# Altium PCB ACH512识别升级仪V1.2_20260608.PcbDoc (part 5 of 6)
Units mil, origin at the board's own origin, x right, y up, seen from the top; angles counter-clockwise.
Board outline 6141.73 x 5401.57 mil, 2 copper layers (Top Layer, Bottom Layer); 157 components, 111 nets, 548 pads, 222 vias.
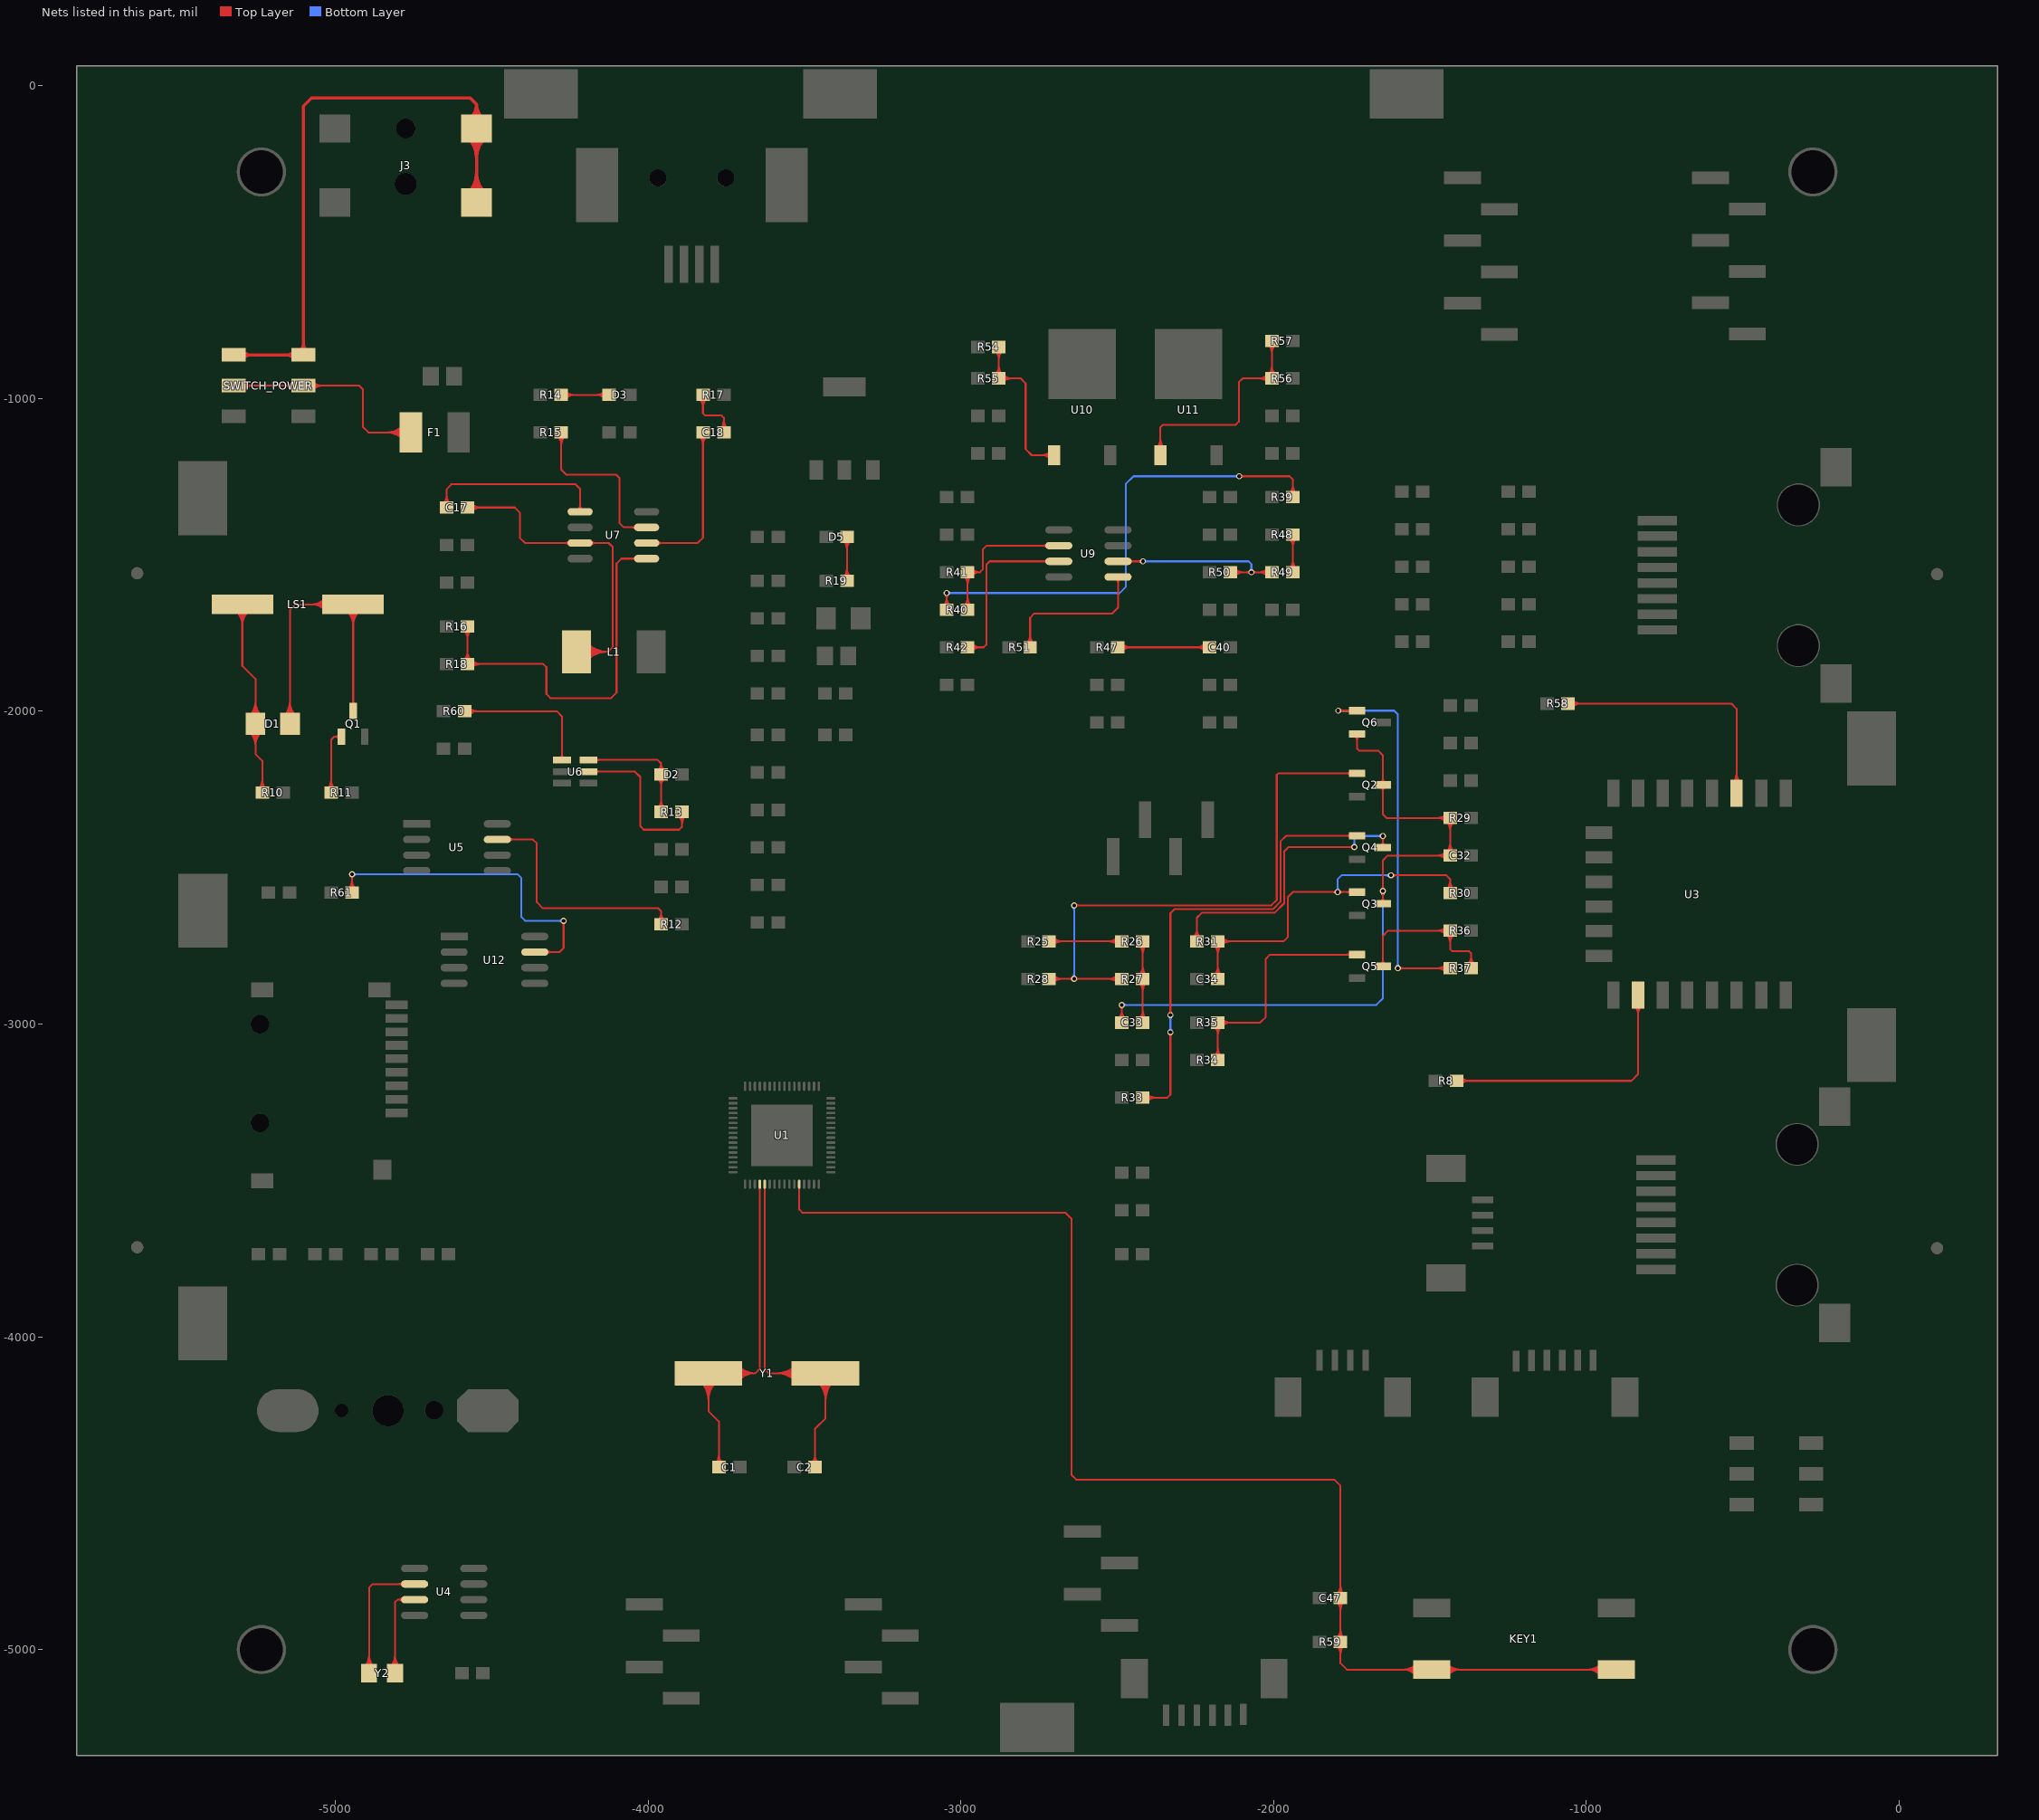
[diagram p5: the nets of this part, all layers, seen from the top]

## Via types
v1: diameter 19.68, hole 11.81, Top Layer to Bottom Layer, 222 vias

## Nets (pads, with @x,y where several pads share a name; then routed paths per layer and width w, separated by ;. In a path a pad name is that pad's centre, name@x,y a point inside that pad or via, vN(x,y) a via of type N, cw(c..) or ccw(c..) an arc to the next point about the centre after c; other vN are vias at no path point) (continued)
NetC17_1: C17.1 U7.1 | length 708.8
  Top Layer w6: C17.1@-4656.07,-1336.79 ccw(c-4685.68,-1307.19) -4643.81,-1307.19 ; C17.1@-4651.83,-1341.03 ccw(c-4671.19,-1321.67) -4643.81,-1321.67 ; C17.1@-4644.27,-1348.59 -4643.81,-1348.13 -4643.81,-1289.59 -4628.81,-1274.59 -4231.81,-1274.59 -4217.11,-1289.29 U7.1@-4217.11,-1362.01 ; -4643.81,-1323.92 ccw(c-4619.6,-1323.92) C17.1@-4636.72,-1341.03 ; -4643.81,-1309.43 ccw(c-4605.11,-1309.43) C17.1@-4632.48,-1336.79 ; U7.1@-4223.47,-1355.64 ccw(c-4238.84,-1340.28) -4217.11,-1340.28 ccw(c-4195.38,-1340.28) U7.1@-4210.75,-1355.64
NetC17_2: C17.2 L1.1 U7.3 | length 1663.5
  Top Layer w6: C17.2@-4577.35,-1348.59 -4425.81,-1348.59 -4409.81,-1364.59 -4409.81,-1445 -4392.8,-1462.01 U7.3@-4217.11,-1462.01 -4125.99,-1462.01 -4112.81,-1475.19 -4112.81,-1794 -4128.33,-1809.52 ; C17.2@-4567.82,-1356.15 cw(c-4549.58,-1374.39) -4549.58,-1348.59 cw(c-4549.58,-1322.79) C17.2@-4567.82,-1341.03 ; C17.2@-4563.58,-1360.39 cw(c-4535.1,-1388.87) -4535.1,-1348.59 cw(c-4535.1,-1308.31) C17.2@-4563.58,-1336.79 ; U7.3@-4251.47,-1468.37 ccw(c-4266.84,-1483.74) -4266.84,-1462.01 ccw(c-4266.84,-1440.28) U7.3@-4251.47,-1455.64 ; L1.1@-4228.4,-1809.52 -4128.33,-1809.52 ; L1.1@-4210.01,-1826.82 cw(c-4169.98,-1864.48) -4169.98,-1809.52 cw(c-4169.98,-1754.57) L1.1@-4210.01,-1792.22 ; L1.1@-4205.64,-1830.94 cw(c-4156.1,-1877.53) -4156.1,-1809.52 cw(c-4156.1,-1741.51) L1.1@-4205.64,-1788.11 ; L1.1@-4201.27,-1835.05 cw(c-4142.22,-1890.59) -4142.22,-1809.52 cw(c-4142.22,-1728.46) L1.1@-4201.27,-1784 ; L1.1@-4196.9,-1839.16 cw(c-4128.34,-1903.65) -4128.34,-1809.52 ; L1.1@-4196.9,-1779.89 ccw(c-4128.34,-1715.4) -4128.34,-1809.52 ; U7.3@-4182.75,-1468.37 cw(c-4167.38,-1483.74) -4167.38,-1462.01 cw(c-4167.38,-1440.28) U7.3@-4182.75,-1455.64
NetC18_1: C18.1 U7.6 | length 661.6
  Top Layer w6: U7.6@-4004.51,-1462.01 -3841.28,-1462.01 -3824.27,-1445 C18.1@-3824.27,-1108.59 ; U7.6@-3970.15,-1468.37 cw(c-3954.78,-1483.74) -3954.78,-1462.01 cw(c-3954.78,-1440.28) U7.6@-3970.15,-1455.64 ; C18.1@-3836.07,-1120.39 cw(c-3864.56,-1148.87) -3824.27,-1148.87 cw(c-3783.99,-1148.87) C18.1@-3812.48,-1120.39 ; C18.1@-3831.83,-1116.15 cw(c-3850.07,-1134.39) -3824.27,-1134.39 cw(c-3798.48,-1134.39) C18.1@-3816.72,-1116.15
NetC18_2: C18.2 R17.2 | length 385.8
  Top Layer w6: R17.2@-3836.07,-1000.39 cw(c-3864.56,-1028.87) -3824.27,-1028.87 cw(c-3783.99,-1028.87) R17.2@-3812.48,-1000.39 ; R17.2@-3831.83,-996.15 cw(c-3850.07,-1014.39) -3824.27,-1014.39 cw(c-3798.48,-1014.39) R17.2@-3816.72,-996.15 ; R17.2@-3824.27,-988.59 -3824.27,-1047.13 -3816.81,-1054.59 -3764.81,-1054.59 -3757.35,-1062.05 C18.2@-3757.35,-1108.59 ; C18.2@-3769.14,-1096.79 ccw(c-3797.63,-1068.31) -3757.35,-1068.31 ccw(c-3717.06,-1068.31) C18.2@-3745.55,-1096.79 ; C18.2@-3764.9,-1101.03 ccw(c-3783.14,-1082.79) -3757.35,-1082.79 ccw(c-3731.55,-1082.79) C18.2@-3749.79,-1101.03
NetC32_1: C32.1 C33.2 Q2.3 Q3.3 Q6.2 R29.1 | length 3052.4
  Top Layer w6: C33.2@-2497.07,-2983.79 ccw(c-2525.56,-2955.31) -2485.27,-2955.31 ccw(c-2444.99,-2955.31) C33.2@-2473.48,-2983.79 ; C33.2@-2492.83,-2988.03 ccw(c-2511.07,-2969.79) -2485.27,-2969.79 ccw(c-2459.48,-2969.79) C33.2@-2477.72,-2988.03 ; v1@-2490.11,-2943.89 cw(c-2501.79,-2955.57) -2485.27,-2955.57 cw(c-2468.76,-2955.57) v1@-2480.44,-2943.89 ; C33.2@-2485.27,-2995.59 v1(-2485.27,-2939.05) ; Q6.2@-1739.38,-2079.22 cw(c-1754.42,-2094.26) -1733.15,-2094.26 cw(c-1711.88,-2094.26) Q6.2@-1726.92,-2079.22 ; Q6.2@-1733.15,-2072.99 -1733.15,-2119.25 -1726.81,-2125.59 -1665.81,-2125.59 -1650.47,-2140.93 Q2.3@-1650.47,-2235.59 -1650.47,-2328.93 -1637.81,-2341.59 R29.1@-1435.27,-2341.59 C32.1@-1435.27,-2461.59 -1634.81,-2461.59 -1650.47,-2477.25 v1(-1650.47,-2574.59) Q3.3@-1650.47,-2615.59 ; Q3.3@-1656.7,-2609.36 ccw(c-1671.74,-2594.32) -1650.47,-2594.32 ccw(c-1629.2,-2594.32) Q3.3@-1644.24,-2609.36 ; Q2.3@-1656.7,-2241.82 cw(c-1671.74,-2256.86) -1650.47,-2256.86 cw(c-1629.2,-2256.86) Q2.3@-1644.24,-2241.82 ; Q2.3@-1656.7,-2229.36 ccw(c-1671.74,-2214.32) -1650.47,-2214.32 ccw(c-1629.2,-2214.32) Q2.3@-1644.24,-2229.36 ; v1@-1655.31,-2579.43 cw(c-1666.99,-2591.11) -1650.47,-2591.11 cw(c-1633.95,-2591.11) v1@-1645.63,-2579.43 ; v1@-1655.31,-2569.75 ccw(c-1666.99,-2558.07) -1650.47,-2558.07 ccw(c-1633.95,-2558.07) v1@-1645.63,-2569.75 ; C32.1@-1449.04,-2473.39 ccw(c-1477.52,-2501.87) -1477.52,-2461.59 ccw(c-1477.52,-2421.31) C32.1@-1449.04,-2449.79 ; R29.1@-1449.04,-2353.39 ccw(c-1477.52,-2381.87) -1477.52,-2341.59 ccw(c-1477.52,-2301.31) R29.1@-1449.04,-2329.79 ; C32.1@-1447.07,-2449.79 ccw(c-1475.56,-2421.31) -1435.27,-2421.31 ccw(c-1394.99,-2421.31) C32.1@-1423.48,-2449.79 ; R29.1@-1447.07,-2353.39 cw(c-1475.56,-2381.87) -1435.27,-2381.87 cw(c-1394.99,-2381.87) R29.1@-1423.48,-2353.39 ; C32.1@-1444.8,-2469.15 ccw(c-1463.04,-2487.39) -1463.04,-2461.59 ccw(c-1463.04,-2435.79) C32.1@-1444.8,-2454.03 ; R29.1@-1444.8,-2349.15 ccw(c-1463.04,-2367.39) -1463.04,-2341.59 ccw(c-1463.04,-2315.79) R29.1@-1444.8,-2334.03 ; C32.1@-1442.83,-2454.03 ccw(c-1461.07,-2435.79) -1435.27,-2435.79 ccw(c-1409.48,-2435.79) C32.1@-1427.72,-2454.03 ; R29.1@-1442.83,-2349.15 cw(c-1461.07,-2367.39) -1435.27,-2367.39 cw(c-1409.48,-2367.39) R29.1@-1427.72,-2349.15
  Bottom Layer w6: v1(-2485.27,-2939.05) -1671.27,-2939.05 -1650.47,-2918.25 v1(-1650.47,-2574.59) ; v1@-2480.44,-2943.89 cw(c-2468.76,-2955.57) -2468.76,-2939.05 cw(c-2468.76,-2922.54) v1@-2480.44,-2934.22 ; v1@-1655.31,-2579.43 cw(c-1666.99,-2591.11) -1650.47,-2591.11 cw(c-1633.95,-2591.11) v1@-1645.63,-2579.43
NetC33_1: C33.1 R26.1 R27.2 | length 675.2
  Top Layer w6: C33.1@-2430.14,-2983.79 ccw(c-2458.63,-2955.31) -2418.35,-2955.31 ccw(c-2378.06,-2955.31) C33.1@-2406.55,-2983.79 ; R27.2@-2430.14,-2867.39 cw(c-2458.63,-2895.87) -2418.35,-2895.87 cw(c-2378.06,-2895.87) R27.2@-2406.55,-2867.39 ; R27.2@-2430.14,-2843.79 ccw(c-2458.63,-2815.31) -2418.35,-2815.31 ccw(c-2378.06,-2815.31) R27.2@-2406.55,-2843.79 ; R26.1@-2430.14,-2747.39 cw(c-2458.63,-2775.87) -2418.35,-2775.87 cw(c-2378.06,-2775.87) R26.1@-2406.55,-2747.39 ; C33.1@-2425.9,-2988.03 ccw(c-2444.14,-2969.79) -2418.35,-2969.79 ccw(c-2392.55,-2969.79) C33.1@-2410.79,-2988.03 ; R27.2@-2425.9,-2863.15 cw(c-2444.14,-2881.39) -2418.35,-2881.39 cw(c-2392.55,-2881.39) R27.2@-2410.79,-2863.15 ; R27.2@-2425.9,-2848.03 ccw(c-2444.14,-2829.79) -2418.35,-2829.79 ccw(c-2392.55,-2829.79) R27.2@-2410.79,-2848.03 ; R26.1@-2425.9,-2743.15 cw(c-2444.14,-2761.39) -2418.35,-2761.39 cw(c-2392.55,-2761.39) R26.1@-2410.79,-2743.15 ; C33.1@-2418.35,-2995.59 R26.1@-2418.35,-2735.59
NetC34_2: C34.2 Q3.1 R30.1 R31.1 | length 1739.5
  Top Layer w6: C34.2@-2190.14,-2843.79 ccw(c-2218.63,-2815.31) -2178.35,-2815.31 ccw(c-2138.06,-2815.31) C34.2@-2166.55,-2843.79 ; R31.1@-2190.14,-2747.39 cw(c-2218.63,-2775.87) -2178.35,-2775.87 cw(c-2138.06,-2775.87) R31.1@-2166.55,-2747.39 ; C34.2@-2185.9,-2848.03 ccw(c-2204.14,-2829.79) -2178.35,-2829.79 ccw(c-2152.55,-2829.79) C34.2@-2170.79,-2848.03 ; R31.1@-2185.9,-2743.15 cw(c-2204.14,-2761.39) -2178.35,-2761.39 cw(c-2152.55,-2761.39) R31.1@-2170.79,-2743.15 ; C34.2@-2178.35,-2855.59 R31.1@-2178.35,-2735.59 -1967.81,-2735.59 -1953.81,-2721.59 -1953.81,-2593.59 -1938.41,-2578.19 v1(-1794.81,-2578.19) Q3.1@-1733.15,-2578.19 ; R31.1@-2168.82,-2743.15 cw(c-2150.58,-2761.39) -2150.58,-2735.59 cw(c-2150.58,-2709.79) R31.1@-2168.82,-2728.03 ; R31.1@-2164.58,-2747.39 cw(c-2136.1,-2775.87) -2136.1,-2735.59 cw(c-2136.1,-2695.31) R31.1@-2164.58,-2723.79 ; v1@-1799.65,-2583.03 ccw(c-1811.33,-2594.71) -1811.33,-2578.19 ccw(c-1811.33,-2561.67) v1@-1799.65,-2573.35 ; v1@-1789.97,-2583.03 cw(c-1778.29,-2594.71) -1778.29,-2578.19 cw(c-1778.29,-2561.67) v1@-1789.97,-2573.35 ; Q3.1@-1753.16,-2584.42 ccw(c-1768.2,-2599.46) -1768.2,-2578.19 ccw(c-1768.2,-2556.92) Q3.1@-1753.16,-2571.96 ; v1(-1624.81,-2524.59) -1447.81,-2524.59 -1435.27,-2537.13 R30.1@-1435.27,-2581.59 ; v1@-1619.97,-2529.43 cw(c-1608.29,-2541.11) -1608.29,-2524.59 cw(c-1608.29,-2508.07) v1@-1619.97,-2519.75 ; R30.1@-1447.07,-2569.79 ccw(c-1475.56,-2541.31) -1435.27,-2541.31 ccw(c-1394.99,-2541.31) R30.1@-1423.48,-2569.79 ; R30.1@-1442.83,-2574.03 ccw(c-1461.07,-2555.79) -1435.27,-2555.79 ccw(c-1409.48,-2555.79) R30.1@-1427.72,-2574.03
  Bottom Layer w6: v1@-1799.65,-2573.35 ccw(c-1811.33,-2561.67) -1794.81,-2561.67 ccw(c-1778.29,-2561.67) v1@-1789.97,-2573.35 ; v1(-1794.81,-2578.19) -1794.81,-2536.59 -1782.81,-2524.59 v1(-1624.81,-2524.59) ; v1@-1629.65,-2529.43 ccw(c-1641.33,-2541.11) -1641.33,-2524.59 ccw(c-1641.33,-2508.07) v1@-1629.65,-2519.75
NetC40_2: C40.2 R47.1 | length 500.7
  Top Layer w6: R47.1@-2498.35,-1795.59 C40.2@-2205.27,-1795.59 ; R47.1@-2488.82,-1803.15 cw(c-2470.58,-1821.39) -2470.58,-1795.59 cw(c-2470.58,-1769.79) R47.1@-2488.82,-1788.03 ; R47.1@-2484.58,-1807.39 cw(c-2456.1,-1835.87) -2456.1,-1795.59 cw(c-2456.1,-1755.31) R47.1@-2484.58,-1783.79 ; C40.2@-2219.04,-1807.39 ccw(c-2247.52,-1835.87) -2247.52,-1795.59 ccw(c-2247.52,-1755.31) C40.2@-2219.04,-1783.79 ; C40.2@-2214.8,-1803.15 ccw(c-2233.04,-1821.39) -2233.04,-1795.59 ccw(c-2233.04,-1769.79) C40.2@-2214.8,-1788.03
NetD1_1: D1.1 LS1.1 Q1.3 | length 1715.5
  Top Layer w6: D1.1@-5165.03,-2015.91 ccw(c-5213.68,-1967.27) -5144.88,-1967.27 ccw(c-5076.09,-1967.27) D1.1@-5124.73,-2015.91 ; D1.1@-5160.79,-2020.16 ccw(c-5199.19,-1981.75) -5144.88,-1981.75 ccw(c-5090.57,-1981.75) D1.1@-5128.97,-2020.16 ; D1.1@-5156.55,-2024.4 ccw(c-5184.71,-1996.24) -5144.88,-1996.24 ccw(c-5105.06,-1996.24) D1.1@-5133.22,-2024.4 ; D1.1@-5144.88,-2040 -5144.88,-1674.88 -5128.37,-1658.37 LS1.1@-4942.83,-1658.37 Q1.3@-4942.83,-1998.66 ; LS1.1@-5029.91,-1678.52 ccw(c-5078.56,-1727.16) -5078.56,-1658.37 ccw(c-5078.56,-1589.57) LS1.1@-5029.91,-1638.22 ; LS1.1@-5025.67,-1674.28 ccw(c-5064.07,-1712.68) -5064.07,-1658.37 ccw(c-5064.07,-1604.06) LS1.1@-5025.67,-1642.46 ; LS1.1@-5021.43,-1670.03 ccw(c-5049.59,-1698.19) -5049.59,-1658.37 ccw(c-5049.59,-1618.54) LS1.1@-5021.43,-1646.71 ; LS1.1@-4962.98,-1678.52 cw(c-5011.63,-1727.16) -4942.83,-1727.16 cw(c-4874.04,-1727.16) LS1.1@-4922.68,-1678.52 ; LS1.1@-4958.74,-1674.28 cw(c-4997.14,-1712.68) -4942.83,-1712.68 cw(c-4888.52,-1712.68) LS1.1@-4926.93,-1674.28 ; LS1.1@-4954.5,-1670.03 cw(c-4982.66,-1698.19) -4942.83,-1698.19 cw(c-4903.01,-1698.19) LS1.1@-4931.17,-1670.03 ; Q1.3@-4949.06,-1978.65 ccw(c-4964.11,-1963.61) -4942.83,-1963.61 ccw(c-4921.56,-1963.61) Q1.3@-4936.6,-1978.65
NetD1_2: D1.2 LS1.2 R10.1 | length 1499.6
  Top Layer w6: LS1.2@-5317.32,-1678.52 cw(c-5365.96,-1727.16) -5297.17,-1727.16 cw(c-5228.37,-1727.16) LS1.2@-5277.02,-1678.52 ; LS1.2@-5313.07,-1674.28 cw(c-5351.48,-1712.68) -5297.17,-1712.68 cw(c-5242.86,-1712.68) LS1.2@-5281.26,-1674.28 ; LS1.2@-5308.83,-1670.03 cw(c-5336.99,-1698.19) -5297.17,-1698.19 cw(c-5257.34,-1698.19) LS1.2@-5285.5,-1670.03 ; LS1.2@-5297.17,-1658.37 -5297.17,-1854.83 -5255.12,-1896.88 D1.2@-5255.12,-2040 -5255.12,-2136.88 -5233.46,-2158.54 R10.1@-5233.46,-2260 ; D1.2@-5275.27,-2064.09 cw(c-5323.91,-2112.73) -5255.12,-2112.73 cw(c-5186.32,-2112.73) D1.2@-5234.97,-2064.09 ; D1.2@-5275.27,-2015.91 ccw(c-5323.91,-1967.27) -5255.12,-1967.27 ccw(c-5186.32,-1967.27) D1.2@-5234.97,-2015.91 ; D1.2@-5271.03,-2059.84 cw(c-5309.43,-2098.25) -5255.12,-2098.25 cw(c-5200.81,-2098.25) D1.2@-5239.21,-2059.84 ; D1.2@-5271.03,-2020.16 ccw(c-5309.43,-1981.75) -5255.12,-1981.75 ccw(c-5200.81,-1981.75) D1.2@-5239.21,-2020.16 ; D1.2@-5266.78,-2055.6 cw(c-5294.94,-2083.76) -5255.12,-2083.76 cw(c-5215.29,-2083.76) D1.2@-5243.45,-2055.6 ; D1.2@-5266.78,-2024.4 ccw(c-5294.94,-1996.24) -5255.12,-1996.24 ccw(c-5215.29,-1996.24) D1.2@-5243.45,-2024.4 ; R10.1@-5245.26,-2248.2 ccw(c-5273.75,-2219.72) -5233.46,-2219.72 ccw(c-5193.18,-2219.72) R10.1@-5221.67,-2248.2 ; R10.1@-5241.02,-2252.44 ccw(c-5259.26,-2234.2) -5233.46,-2234.2 ccw(c-5207.67,-2234.2) R10.1@-5225.91,-2252.44
NetD2_1: D2.1 R13.1 U6.6 | length 711.2
  Top Layer w6: U6.6@-4190.49,-2155.51 -3969.49,-2155.51 -3958.27,-2166.73 ; U6.6@-4167.23,-2161.05 cw(c-4153.87,-2174.41) -4153.87,-2155.51 cw(c-4153.87,-2136.61) U6.6@-4167.23,-2149.98 ; R13.1@-3970.07,-2309.79 ccw(c-3998.56,-2281.31) -3958.27,-2281.31 ccw(c-3917.99,-2281.31) R13.1@-3946.48,-2309.79 ; D2.1@-3970.07,-2213.39 cw(c-3998.56,-2241.87) -3958.27,-2241.87 cw(c-3917.99,-2241.87) D2.1@-3946.48,-2213.39 ; D2.1@-3968.74,-2188.6 ccw(c-3986.35,-2166.73) -3958.27,-2166.73 ; R13.1@-3965.83,-2314.03 ccw(c-3984.07,-2295.79) -3958.27,-2295.79 ccw(c-3932.48,-2295.79) R13.1@-3950.72,-2314.03 ; D2.1@-3965.83,-2209.15 cw(c-3984.07,-2227.39) -3958.27,-2227.39 cw(c-3932.48,-2227.39) D2.1@-3950.72,-2209.15 ; D2.1@-3964.98,-2193.27 ccw(c-3976.26,-2179.26) -3958.27,-2179.26 ccw(c-3940.29,-2179.26) D2.1@-3951.57,-2193.27 ; R13.1@-3958.27,-2321.59 D2.1@-3958.27,-2201.59 -3958.27,-2166.73 ; D2.1@-3947.81,-2188.6 cw(c-3930.2,-2166.73) -3958.27,-2166.73
NetD3_1: D3.1 R14.1 | length 360.7
  Top Layer w6: R14.1@-4277.35,-988.59 D3.1@-4124.27,-988.59 ; R14.1@-4267.82,-996.15 cw(c-4249.58,-1014.39) -4249.58,-988.59 cw(c-4249.58,-962.79) R14.1@-4267.82,-981.03 ; R14.1@-4263.58,-1000.39 cw(c-4235.1,-1028.87) -4235.1,-988.59 cw(c-4235.1,-948.31) R14.1@-4263.58,-976.79 ; D3.1@-4138.04,-1000.39 ccw(c-4166.52,-1028.87) -4166.52,-988.59 ccw(c-4166.52,-948.31) D3.1@-4138.04,-976.79 ; D3.1@-4133.8,-996.15 ccw(c-4152.04,-1014.39) -4152.04,-988.59 ccw(c-4152.04,-962.79) D3.1@-4133.8,-981.03
NetD5_1: D5.1 R19.1 | length 347.6
  Top Layer w6: R19.1@-3375.61,-1570.79 ccw(c-3404.09,-1542.31) -3363.81,-1542.31 ccw(c-3323.53,-1542.31) R19.1@-3352.01,-1570.79 ; D5.1@-3375.61,-1454.39 cw(c-3404.09,-1482.87) -3363.81,-1482.87 cw(c-3323.53,-1482.87) D5.1@-3352.01,-1454.39 ; R19.1@-3371.37,-1575.03 ccw(c-3389.61,-1556.79) -3363.81,-1556.79 ccw(c-3338.01,-1556.79) R19.1@-3356.25,-1575.03 ; D5.1@-3371.37,-1450.15 cw(c-3389.61,-1468.39) -3363.81,-1468.39 cw(c-3338.01,-1468.39) D5.1@-3356.25,-1450.15 ; R19.1@-3363.81,-1582.59 D5.1@-3363.81,-1442.59
NetF1_1: F1.1 SWITCH_POWER.2 | length 1418.9
  Top Layer w6: SWITCH_POWER.2@-5324.25,-959.16 SWITCH_POWER.2@-5101.81,-959.16 -4923.24,-959.16 -4911.81,-970.59 -4911.81,-1090.59 -4893.81,-1108.59 F1.1@-4757.81,-1108.59 ; SWITCH_POWER.2@-5298.57,-968.11 cw(c-5276.97,-989.71) -5276.97,-959.16 cw(c-5276.97,-928.62) SWITCH_POWER.2@-5298.57,-950.22 ; SWITCH_POWER.2@-5294.33,-972.35 cw(c-5262.48,-1004.2) -5262.48,-959.16 cw(c-5262.48,-914.13) SWITCH_POWER.2@-5294.33,-945.97 ; SWITCH_POWER.2@-5131.73,-972.35 ccw(c-5163.58,-1004.2) -5163.58,-959.16 ccw(c-5163.58,-914.13) SWITCH_POWER.2@-5131.73,-945.97 ; SWITCH_POWER.2@-5127.49,-968.11 ccw(c-5149.09,-989.71) -5149.09,-959.16 ccw(c-5149.09,-928.62) SWITCH_POWER.2@-5127.49,-950.22 ; SWITCH_POWER.2@-5076.13,-968.11 cw(c-5054.53,-989.71) -5054.53,-959.16 cw(c-5054.53,-928.62) SWITCH_POWER.2@-5076.13,-950.22 ; SWITCH_POWER.2@-5071.89,-972.35 cw(c-5040.04,-1004.2) -5040.04,-959.16 cw(c-5040.04,-914.13) SWITCH_POWER.2@-5071.89,-945.97 ; F1.1@-4781.14,-1131.92 ccw(c-4837.48,-1188.26) -4837.48,-1108.59 ccw(c-4837.48,-1028.92) F1.1@-4781.14,-1085.26 ; F1.1@-4776.9,-1127.68 ccw(c-4822.99,-1173.77) -4822.99,-1108.59 ccw(c-4822.99,-1043.41) F1.1@-4776.9,-1089.5 ; F1.1@-4772.66,-1123.44 ccw(c-4808.51,-1159.29) -4808.51,-1108.59 ccw(c-4808.51,-1057.89) F1.1@-4772.66,-1093.74 ; F1.1@-4768.42,-1119.2 ccw(c-4794.02,-1144.8) -4794.02,-1108.59 ccw(c-4794.02,-1072.38) F1.1@-4768.42,-1097.98
NetQ1_2: Q1.1 R11.2 | length 343.2
  Top Layer w6: R11.2@-5025.26,-2248.2 ccw(c-5053.75,-2219.72) -5013.46,-2219.72 ccw(c-4973.18,-2219.72) R11.2@-5001.67,-2248.2 ; R11.2@-5021.02,-2252.44 ccw(c-5039.26,-2234.2) -5013.46,-2234.2 ccw(c-4987.67,-2234.2) R11.2@-5005.91,-2252.44 ; R11.2@-5013.46,-2260 -5013.46,-2091.46 -5003.34,-2081.34 Q1.1@-4980.24,-2081.34 ; Q1.1@-4986.47,-2087.57 ccw(c-5001.51,-2102.61) -5001.51,-2081.34 ccw(c-5001.51,-2060.07) Q1.1@-4986.47,-2075.11
NetQ2_1: Q2.1 R27.1 R28.2 | length 2152.8
  Top Layer w6: R28.2@-2718.35,-2855.59 v1(-2637.81,-2855.59) R27.1@-2485.27,-2855.59 ; R28.2@-2708.82,-2863.15 cw(c-2690.58,-2881.39) -2690.58,-2855.59 cw(c-2690.58,-2829.79) R28.2@-2708.82,-2848.03 ; R28.2@-2704.58,-2867.39 cw(c-2676.1,-2895.87) -2676.1,-2855.59 cw(c-2676.1,-2815.31) R28.2@-2704.58,-2843.79 ; v1@-2642.65,-2860.43 ccw(c-2654.33,-2872.11) -2654.33,-2855.59 ccw(c-2654.33,-2839.07) v1@-2642.65,-2850.75 ; v1(-2637.81,-2620.59) -2006.75,-2620.59 -1989.81,-2603.65 -1989.81,-2203.59 -1984.41,-2198.19 Q2.1@-1733.15,-2198.19 ; v1@-2632.97,-2860.43 cw(c-2621.29,-2872.11) -2621.29,-2855.59 cw(c-2621.29,-2839.07) v1@-2632.97,-2850.75 ; v1@-2632.97,-2625.43 cw(c-2621.29,-2637.11) -2621.29,-2620.59 cw(c-2621.29,-2604.07) v1@-2632.97,-2615.75 ; R27.1@-2499.04,-2867.39 ccw(c-2527.52,-2895.87) -2527.52,-2855.59 ccw(c-2527.52,-2815.31) R27.1@-2499.04,-2843.79 ; R27.1@-2494.8,-2863.15 ccw(c-2513.04,-2881.39) -2513.04,-2855.59 ccw(c-2513.04,-2829.79) R27.1@-2494.8,-2848.03 ; Q2.1@-1753.16,-2204.42 ccw(c-1768.2,-2219.46) -1768.2,-2198.19 ccw(c-1768.2,-2176.92) Q2.1@-1753.16,-2191.96
  Bottom Layer w6: v1@-2642.65,-2850.75 ccw(c-2654.33,-2839.07) -2637.81,-2839.07 ccw(c-2621.29,-2839.07) v1@-2632.97,-2850.75 ; v1@-2642.65,-2625.43 cw(c-2654.33,-2637.11) -2637.81,-2637.11 cw(c-2621.29,-2637.11) v1@-2632.97,-2625.43 ; v1(-2637.81,-2855.59) v1(-2637.81,-2620.59)
NetQ4_1: Q4.3 R31.2 | length 1169.2
  Top Layer w6: R31.2@-2257.07,-2723.79 ccw(c-2285.56,-2695.31) -2245.27,-2695.31 ccw(c-2204.99,-2695.31) R31.2@-2233.48,-2723.79 ; R31.2@-2252.83,-2728.03 ccw(c-2271.07,-2709.79) -2245.27,-2709.79 ccw(c-2219.48,-2709.79) R31.2@-2237.72,-2728.03 ; R31.2@-2245.27,-2735.59 -2245.27,-2660.05 -2229.81,-2644.59 -1996.81,-2644.59 -1965.81,-2613.59 -1965.81,-2447.59 -1952.81,-2434.59 v1(-1741.81,-2434.59) ; v1@-1746.65,-2439.43 ccw(c-1758.33,-2451.11) -1758.33,-2434.59 ccw(c-1758.33,-2418.07) v1@-1746.65,-2429.75 ; Q4.3@-1656.7,-2429.36 ccw(c-1671.74,-2414.32) -1650.47,-2414.32 ccw(c-1629.2,-2414.32) Q4.3@-1644.24,-2429.36 ; v1@-1655.31,-2403.77 cw(c-1666.99,-2415.45) -1650.47,-2415.45 cw(c-1633.95,-2415.45) v1@-1645.63,-2403.77 ; Q4.3@-1650.47,-2435.59 v1(-1650.47,-2398.93)
  Bottom Layer w6: v1@-1746.65,-2429.75 ccw(c-1758.33,-2418.07) -1741.81,-2418.07 ccw(c-1725.29,-2418.07) v1@-1736.97,-2429.75 ; v1(-1741.81,-2434.59) -1741.81,-2407.59 -1733.15,-2398.93 v1(-1650.47,-2398.93) ; v1@-1655.31,-2403.77 ccw(c-1666.99,-2415.45) -1666.99,-2398.93 ccw(c-1666.99,-2382.41) v1@-1655.31,-2394.09
NetQ4_2: Q4.1 R33.1 | length 1725.3
  Top Layer w6: R33.1@-2418.35,-3235.59 -2339.81,-3235.59 -2329.81,-3225.59 v1(-2329.81,-3026.59) ; R33.1@-2408.82,-3243.15 cw(c-2390.58,-3261.39) -2390.58,-3235.59 cw(c-2390.58,-3209.79) R33.1@-2408.82,-3228.03 ; R33.1@-2404.58,-3247.39 cw(c-2376.1,-3275.87) -2376.1,-3235.59 cw(c-2376.1,-3195.31) R33.1@-2404.58,-3223.79 ; v1@-2334.65,-3031.43 cw(c-2346.33,-3043.11) -2329.81,-3043.11 cw(c-2313.29,-3043.11) v1@-2324.97,-3031.43 ; v1@-2334.65,-2966.75 ccw(c-2346.33,-2955.07) -2329.81,-2955.07 ccw(c-2313.29,-2955.07) v1@-2324.97,-2966.75 ; v1(-2329.81,-2971.59) -2329.81,-2645.59 -2316.81,-2632.59 -2001.78,-2632.59 -1977.81,-2608.62 -1977.81,-2416.59 -1959.41,-2398.19 Q4.1@-1733.15,-2398.19 ; Q4.1@-1753.16,-2404.42 ccw(c-1768.2,-2419.46) -1768.2,-2398.19 ccw(c-1768.2,-2376.92) Q4.1@-1753.16,-2391.96
  Bottom Layer w6: v1@-2334.65,-3021.75 ccw(c-2346.33,-3010.07) -2329.81,-3010.07 ccw(c-2313.29,-3010.07) v1@-2324.97,-3021.75 ; v1@-2334.65,-2976.43 cw(c-2346.33,-2988.11) -2329.81,-2988.11 cw(c-2313.29,-2988.11) v1@-2324.97,-2976.43 ; v1(-2329.81,-3026.59) v1(-2329.81,-2971.59)
NetQ5_1: Q5.1 R34.1 R35.1 | length 1109
  Top Layer w6: R34.1@-2190.14,-3103.79 ccw(c-2218.63,-3075.31) -2178.35,-3075.31 ccw(c-2138.06,-3075.31) R34.1@-2166.55,-3103.79 ; R35.1@-2190.14,-3007.39 cw(c-2218.63,-3035.87) -2178.35,-3035.87 cw(c-2138.06,-3035.87) R35.1@-2166.55,-3007.39 ; R34.1@-2185.9,-3108.03 ccw(c-2204.14,-3089.79) -2178.35,-3089.79 ccw(c-2152.55,-3089.79) R34.1@-2170.79,-3108.03 ; R35.1@-2185.9,-3003.15 cw(c-2204.14,-3021.39) -2178.35,-3021.39 cw(c-2152.55,-3021.39) R35.1@-2170.79,-3003.15 ; R34.1@-2178.35,-3115.59 R35.1@-2178.35,-2995.59 -2042.81,-2995.59 -2024.81,-2977.59 -2024.81,-2791.59 -2011.41,-2778.19 Q5.1@-1733.15,-2778.19 ; R35.1@-2168.82,-3003.15 cw(c-2150.58,-3021.39) -2150.58,-2995.59 cw(c-2150.58,-2969.79) R35.1@-2168.82,-2988.03 ; R35.1@-2164.58,-3007.39 cw(c-2136.1,-3035.87) -2136.1,-2995.59 cw(c-2136.1,-2955.31) R35.1@-2164.58,-2983.79 ; Q5.1@-1753.16,-2784.42 ccw(c-1768.2,-2799.46) -1768.2,-2778.19 ccw(c-1768.2,-2756.92) Q5.1@-1753.16,-2771.96
NetQ5_3: Q5.3 R36.2 R37.2 | length 843.6
  Top Layer w6: Q5.3@-1656.7,-2809.36 ccw(c-1671.74,-2794.32) -1650.47,-2794.32 ccw(c-1629.2,-2794.32) Q5.3@-1644.24,-2809.36 ; Q5.3@-1650.47,-2815.59 -1650.47,-2718.25 -1633.81,-2701.59 R36.2@-1435.27,-2701.59 -1435.27,-2761.13 -1428.81,-2767.59 -1374.81,-2767.59 -1368.35,-2774.05 R37.2@-1368.35,-2821.59 ; R36.2@-1449.04,-2713.39 ccw(c-1477.52,-2741.87) -1477.52,-2701.59 ccw(c-1477.52,-2661.31) R36.2@-1449.04,-2689.79 ; R36.2@-1447.07,-2713.39 cw(c-1475.56,-2741.87) -1435.27,-2741.87 cw(c-1394.99,-2741.87) R36.2@-1423.48,-2713.39 ; R36.2@-1444.8,-2709.15 ccw(c-1463.04,-2727.39) -1463.04,-2701.59 ccw(c-1463.04,-2675.79) R36.2@-1444.8,-2694.03 ; R36.2@-1442.83,-2709.15 cw(c-1461.07,-2727.39) -1435.27,-2727.39 cw(c-1409.48,-2727.39) R36.2@-1427.72,-2709.15 ; R37.2@-1380.14,-2809.79 ccw(c-1408.63,-2781.31) -1368.35,-2781.31 ccw(c-1328.06,-2781.31) R37.2@-1356.55,-2809.79 ; R37.2@-1375.9,-2814.03 ccw(c-1394.14,-2795.79) -1368.35,-2795.79 ccw(c-1342.55,-2795.79) R37.2@-1360.79,-2814.03
NetQ6_2: Q6.1 R37.1 | length 1475.7
  Top Layer w6: v1(-1793.21,-1998.19) Q6.1@-1733.15,-1998.19 ; v1@-1788.37,-2003.03 cw(c-1776.69,-2014.71) -1776.69,-1998.19 cw(c-1776.69,-1981.67) v1@-1788.37,-1993.35 ; Q6.1@-1753.16,-2004.42 ccw(c-1768.2,-2019.46) -1768.2,-1998.19 ccw(c-1768.2,-1976.92) Q6.1@-1753.16,-1991.96 ; v1(-1602.81,-2821.59) R37.1@-1435.27,-2821.59 ; v1@-1597.97,-2826.43 cw(c-1586.29,-2838.11) -1586.29,-2821.59 cw(c-1586.29,-2805.07) v1@-1597.97,-2816.75 ; R37.1@-1449.04,-2833.39 ccw(c-1477.52,-2861.87) -1477.52,-2821.59 ccw(c-1477.52,-2781.31) R37.1@-1449.04,-2809.79 ; R37.1@-1444.8,-2829.15 ccw(c-1463.04,-2847.39) -1463.04,-2821.59 ccw(c-1463.04,-2795.79) R37.1@-1444.8,-2814.03
  Bottom Layer w6: v1(-1793.21,-1998.19) -1614.21,-1998.19 -1602.81,-2009.59 v1(-1602.81,-2821.59) ; v1@-1788.37,-2003.03 cw(c-1776.69,-2014.71) -1776.69,-1998.19 cw(c-1776.69,-1981.67) v1@-1788.37,-1993.35 ; v1@-1607.65,-2816.75 ccw(c-1619.33,-2805.07) -1602.81,-2805.07 ccw(c-1586.29,-2805.07) v1@-1597.97,-2816.75
NetR8_2: R8.2 U3.16 | length 1049.7
  Top Layer w6: R8.2@-1415.35,-3181.59 -855.81,-3181.59 -834.49,-3160.27 U3.16@-834.49,-2907.87 ; R8.2@-1405.82,-3189.15 cw(c-1387.58,-3207.39) -1387.58,-3181.59 cw(c-1387.58,-3155.79) R8.2@-1405.82,-3174.03 ; R8.2@-1401.58,-3193.39 cw(c-1373.1,-3221.87) -1373.1,-3181.59 cw(c-1373.1,-3141.31) R8.2@-1401.58,-3169.79 ; U3.16@-846.29,-2943.29 cw(c-874.77,-2971.78) -834.49,-2971.78 cw(c-794.21,-2971.78) U3.16@-822.69,-2943.29 ; U3.16@-842.04,-2939.05 cw(c-860.28,-2957.29) -834.49,-2957.29 cw(c-808.69,-2957.29) U3.16@-826.93,-2939.05
NetR12_2: R12.2 U5.7 | length 908.8
  Top Layer w6: U5.7@-4482.13,-2410 -4368,-2410 -4355.81,-2422.19 -4355.81,-2610.19 -4336,-2630 -3967,-2630 -3958.27,-2638.73 R12.2@-3958.27,-2681.59 ; U5.7@-4444.4,-2416.23 cw(c-4429.36,-2431.27) -4429.36,-2410 cw(c-4429.36,-2388.73) U5.7@-4444.4,-2403.77 ; R12.2@-3970.07,-2669.79 ccw(c-3998.56,-2641.31) -3958.27,-2641.31 ccw(c-3917.99,-2641.31) R12.2@-3946.48,-2669.79 ; R12.2@-3965.83,-2674.03 ccw(c-3984.07,-2655.79) -3958.27,-2655.79 ccw(c-3932.48,-2655.79) R12.2@-3950.72,-2674.03
NetR13_2: R13.2 U6.5 | length 653.2
  Top Layer w6: U6.5@-4190.49,-2192.91 -4042.09,-2192.91 -4024.81,-2210.19 -4024.81,-2367.59 -4013.81,-2378.59 -3900.81,-2378.59 -3891.35,-2369.13 R13.2@-3891.35,-2321.59 ; U6.5@-4167.23,-2198.45 cw(c-4153.87,-2211.81) -4153.87,-2192.91 cw(c-4153.87,-2174.02) U6.5@-4167.23,-2187.38 ; R13.2@-3903.14,-2333.39 cw(c-3931.63,-2361.87) -3891.35,-2361.87 cw(c-3851.06,-2361.87) R13.2@-3879.55,-2333.39 ; R13.2@-3898.9,-2329.15 cw(c-3917.14,-2347.39) -3891.35,-2347.39 cw(c-3865.55,-2347.39) R13.2@-3883.79,-2329.15
NetR15_1: R15.1 U7.7 | length 690.4
  Top Layer w6: R15.1@-4289.14,-1120.39 cw(c-4317.63,-1148.87) -4277.35,-1148.87 cw(c-4237.06,-1148.87) R15.1@-4265.55,-1120.39 ; R15.1@-4284.9,-1116.15 cw(c-4303.14,-1134.39) -4277.35,-1134.39 cw(c-4251.55,-1134.39) R15.1@-4269.79,-1116.15 ; R15.1@-4277.35,-1108.59 -4277.35,-1227.65 -4262,-1243 -4103,-1243 -4090.81,-1255.19 -4090.81,-1399 -4077.8,-1412.01 U7.7@-4004.51,-1412.01 ; U7.7@-4038.87,-1418.37 ccw(c-4054.24,-1433.74) -4054.24,-1412.01 ccw(c-4054.24,-1390.28) U7.7@-4038.87,-1405.64
NetR16_2: R16.2 R18.1 U7.5 | length 1560.7
  Top Layer w6: R18.1@-4589.14,-1836.79 ccw(c-4617.63,-1808.31) -4577.35,-1808.31 ccw(c-4537.06,-1808.31) R18.1@-4565.55,-1836.79 ; R16.2@-4589.14,-1740.39 cw(c-4617.63,-1768.87) -4577.35,-1768.87 cw(c-4537.06,-1768.87) R16.2@-4565.55,-1740.39 ; R18.1@-4584.9,-1841.03 ccw(c-4603.14,-1822.79) -4577.35,-1822.79 ccw(c-4551.55,-1822.79) R18.1@-4569.79,-1841.03 ; R16.2@-4584.9,-1736.15 cw(c-4603.14,-1754.39) -4577.35,-1754.39 cw(c-4551.55,-1754.39) R16.2@-4569.79,-1736.15 ; R16.2@-4577.35,-1728.59 R18.1@-4577.35,-1848.59 -4335.41,-1848.59 -4325,-1859 -4325,-1945 -4312,-1958 -4118,-1958 -4100.81,-1940.81 -4100.81,-1527.81 -4085.01,-1512.01 U7.5@-4004.51,-1512.01 ; R18.1@-4567.82,-1856.15 cw(c-4549.58,-1874.39) -4549.58,-1848.59 cw(c-4549.58,-1822.79) R18.1@-4567.82,-1841.03 ; R18.1@-4563.58,-1860.39 cw(c-4535.1,-1888.87) -4535.1,-1848.59 cw(c-4535.1,-1808.31) R18.1@-4563.58,-1836.79 ; U7.5@-4038.87,-1518.37 ccw(c-4054.24,-1533.74) -4054.24,-1512.01 ccw(c-4054.24,-1490.28) U7.5@-4038.87,-1505.64
NetR25_1: R25.1 R26.2 | length 440.7
  Top Layer w6: R25.1@-2718.35,-2735.59 R26.2@-2485.27,-2735.59 ; R25.1@-2708.82,-2743.15 cw(c-2690.58,-2761.39) -2690.58,-2735.59 cw(c-2690.58,-2709.79) R25.1@-2708.82,-2728.03 ; R25.1@-2704.58,-2747.39 cw(c-2676.1,-2775.87) -2676.1,-2735.59 cw(c-2676.1,-2695.31) R25.1@-2704.58,-2723.79 ; R26.2@-2499.04,-2747.39 ccw(c-2527.52,-2775.87) -2527.52,-2735.59 ccw(c-2527.52,-2695.31) R26.2@-2499.04,-2723.79 ; R26.2@-2494.8,-2743.15 ccw(c-2513.04,-2761.39) -2513.04,-2735.59 ccw(c-2513.04,-2709.79) R26.2@-2494.8,-2728.03
NetR39_1: R39.1 R40.2 | length 1880.1
  Top Layer w6: R40.2@-3057.07,-1663.79 ccw(c-3085.56,-1635.31) -3045.27,-1635.31 ccw(c-3004.99,-1635.31) R40.2@-3033.48,-1663.79 ; R40.2@-3052.83,-1668.03 ccw(c-3071.07,-1649.79) -3045.27,-1649.79 ccw(c-3019.48,-1649.79) R40.2@-3037.72,-1668.03 ; v1@-3050.11,-1626.89 cw(c-3061.79,-1638.57) -3045.27,-1638.57 cw(c-3028.76,-1638.57) v1@-3040.44,-1626.89 ; R40.2@-3045.27,-1675.59 v1(-3045.27,-1622.05) ; v1(-2109.81,-1248.59) -1948.81,-1248.59 -1938.35,-1259.05 R39.1@-1938.35,-1315.59 ; v1@-2104.97,-1253.43 cw(c-2093.29,-1265.11) -2093.29,-1248.59 cw(c-2093.29,-1232.07) v1@-2104.97,-1243.75 ; R39.1@-1950.14,-1303.79 ccw(c-1978.63,-1275.31) -1938.35,-1275.31 ccw(c-1898.06,-1275.31) R39.1@-1926.55,-1303.79 ; R39.1@-1945.9,-1308.03 ccw(c-1964.14,-1289.79) -1938.35,-1289.79 ccw(c-1912.55,-1289.79) R39.1@-1930.79,-1308.03
  Bottom Layer w6: v1(-3045.27,-1622.05) -2492.27,-1622.05 -2472.81,-1602.59 -2472.81,-1273.59 -2447.81,-1248.59 v1(-2109.81,-1248.59) ; v1@-3040.44,-1626.89 cw(c-3028.76,-1638.57) -3028.76,-1622.05 cw(c-3028.76,-1605.54) v1@-3040.44,-1617.22 ; v1@-2114.65,-1253.43 ccw(c-2126.33,-1265.11) -2126.33,-1248.59 ccw(c-2126.33,-1232.07) v1@-2114.65,-1243.75
NetR40_1: R40.1 R41.2 U9.2 | length 818.3
  Top Layer w6: R40.1@-2990.14,-1663.79 ccw(c-3018.63,-1635.31) -2978.35,-1635.31 ccw(c-2938.06,-1635.31) R40.1@-2966.55,-1663.79 ; R41.2@-2990.14,-1567.39 cw(c-3018.63,-1595.87) -2978.35,-1595.87 cw(c-2938.06,-1595.87) R41.2@-2966.55,-1567.39 ; R40.1@-2985.9,-1668.03 ccw(c-3004.14,-1649.79) -2978.35,-1649.79 ccw(c-2952.55,-1649.79) R40.1@-2970.79,-1668.03 ; R41.2@-2985.9,-1563.15 cw(c-3004.14,-1581.39) -2978.35,-1581.39 cw(c-2952.55,-1581.39) R41.2@-2970.79,-1563.15 ; R40.1@-2978.35,-1675.59 R41.2@-2978.35,-1555.59 -2938.81,-1555.59 ; R41.2@-2968.45,-1562.75 cw(c-2952.32,-1577.33) -2952.32,-1555.59 cw(c-2952.32,-1533.85) R41.2@-2968.45,-1548.43 ; R41.2@-2964,-1566.78 cw(c-2938.81,-1589.53) -2938.81,-1555.59 ; R41.2@-2964,-1544.4 ccw(c-2938.81,-1521.64) -2938.81,-1555.59 ; U9.2@-2724.02,-1476.82 ccw(c-2739.07,-1491.86) -2739.07,-1470.59 ccw(c-2739.07,-1449.32) U9.2@-2724.02,-1464.36 ; U9.2@-2686.3,-1470.59 -2916.81,-1470.59 -2929.81,-1483.59 -2929.81,-1546.59 -2938.81,-1555.59
NetR42_1: R42.1 U9.3 | length 693.1
  Top Layer w6: R42.1@-2978.35,-1795.59 -2926.81,-1795.59 -2917.81,-1786.59 -2917.81,-1530.59 -2907.81,-1520.59 U9.3@-2686.3,-1520.59 ; R42.1@-2968.82,-1803.15 cw(c-2950.58,-1821.39) -2950.58,-1795.59 cw(c-2950.58,-1769.79) R42.1@-2968.82,-1788.03 ; R42.1@-2964.58,-1807.39 cw(c-2936.1,-1835.87) -2936.1,-1795.59 cw(c-2936.1,-1755.31) R42.1@-2964.58,-1783.79 ; U9.3@-2724.02,-1526.82 ccw(c-2739.07,-1541.86) -2739.07,-1520.59 ccw(c-2739.07,-1499.32) U9.3@-2724.02,-1514.36
NetR48_1: R48.1 R49.2 | length 327.6
  Top Layer w6: R49.2@-1950.14,-1543.79 ccw(c-1978.63,-1515.31) -1938.35,-1515.31 ccw(c-1898.06,-1515.31) R49.2@-1926.55,-1543.79 ; R48.1@-1950.14,-1447.39 cw(c-1978.63,-1475.87) -1938.35,-1475.87 cw(c-1898.06,-1475.87) R48.1@-1926.55,-1447.39 ; R49.2@-1945.9,-1548.03 ccw(c-1964.14,-1529.79) -1938.35,-1529.79 ccw(c-1912.55,-1529.79) R49.2@-1930.79,-1548.03 ; R48.1@-1945.9,-1443.15 cw(c-1964.14,-1461.39) -1938.35,-1461.39 cw(c-1912.55,-1461.39) R48.1@-1930.79,-1443.15 ; R49.2@-1938.35,-1555.59 R48.1@-1938.35,-1435.59
NetR49_1: R49.1 R50.2 U9.6 | length 960.1
  Top Layer w6: U9.6@-2497.32,-1520.59 v1(-2417.81,-1520.59) ; U9.6@-2459.6,-1526.82 cw(c-2444.55,-1541.86) -2444.55,-1520.59 cw(c-2444.55,-1499.32) U9.6@-2459.6,-1514.36 ; v1@-2422.65,-1525.43 ccw(c-2434.33,-1537.11) -2434.33,-1520.59 ccw(c-2434.33,-1504.07) v1@-2422.65,-1515.75 ; R50.2@-2138.35,-1555.59 v1(-2070.81,-1555.59) R49.1@-2005.27,-1555.59 ; R50.2@-2128.82,-1563.15 cw(c-2110.58,-1581.39) -2110.58,-1555.59 cw(c-2110.58,-1529.79) R50.2@-2128.82,-1548.03 ; R50.2@-2124.58,-1567.39 cw(c-2096.1,-1595.87) -2096.1,-1555.59 cw(c-2096.1,-1515.31) R50.2@-2124.58,-1543.79 ; v1@-2075.65,-1560.43 ccw(c-2087.33,-1572.11) -2087.33,-1555.59 ccw(c-2087.33,-1539.07) v1@-2075.65,-1550.75 ; v1@-2065.97,-1560.43 cw(c-2054.29,-1572.11) -2054.29,-1555.59 cw(c-2054.29,-1539.07) v1@-2065.97,-1550.75 ; R49.1@-2019.04,-1567.39 ccw(c-2047.52,-1595.87) -2047.52,-1555.59 ccw(c-2047.52,-1515.31) R49.1@-2019.04,-1543.79 ; R49.1@-2014.8,-1563.15 ccw(c-2033.04,-1581.39) -2033.04,-1555.59 ccw(c-2033.04,-1529.79) R49.1@-2014.8,-1548.03
  Bottom Layer w6: v1(-2417.81,-1520.59) -2079.81,-1520.59 -2070.81,-1529.59 v1(-2070.81,-1555.59) ; v1@-2412.97,-1525.43 cw(c-2401.29,-1537.11) -2401.29,-1520.59 cw(c-2401.29,-1504.07) v1@-2412.97,-1515.75 ; v1@-2075.65,-1550.75 ccw(c-2087.33,-1539.07) -2070.81,-1539.07 ccw(c-2054.29,-1539.07) v1@-2065.97,-1550.75
NetR51_1: R51.1 U9.5 | length 624.5
  Top Layer w6: R51.1@-2790.14,-1783.79 ccw(c-2818.63,-1755.31) -2778.35,-1755.31 ccw(c-2738.06,-1755.31) R51.1@-2766.55,-1783.79 ; R51.1@-2785.9,-1788.03 ccw(c-2804.14,-1769.79) -2778.35,-1769.79 ccw(c-2752.55,-1769.79) R51.1@-2770.79,-1788.03 ; R51.1@-2778.35,-1795.59 -2778.35,-1701.13 -2764.81,-1687.59 -2515.81,-1687.59 -2497.32,-1669.1 U9.5@-2497.32,-1570.59 ; U9.5@-2503.55,-1576.82 cw(c-2518.59,-1591.86) -2497.32,-1591.86 cw(c-2476.05,-1591.86) U9.5@-2491.09,-1576.82
NetR54_1: R54.1 R55.2 U10.1 | length 916.5
  Top Layer w6: R55.2@-2890.14,-923.79 ccw(c-2918.63,-895.31) -2878.35,-895.31 ccw(c-2838.06,-895.31) R55.2@-2866.55,-923.79 ; R54.1@-2890.14,-847.39 cw(c-2918.63,-875.87) -2878.35,-875.87 cw(c-2838.06,-875.87) R54.1@-2866.55,-847.39 ; R55.2@-2885.9,-928.03 ccw(c-2904.14,-909.79) -2878.35,-909.79 ccw(c-2852.55,-909.79) R55.2@-2870.79,-928.03 ; R54.1@-2885.9,-843.15 cw(c-2904.14,-861.39) -2878.35,-861.39 cw(c-2852.55,-861.39) R54.1@-2870.79,-843.15 ; R54.1@-2878.35,-835.59 R55.2@-2878.35,-935.59 -2808.81,-935.59 -2792.81,-951.59 -2792.81,-1161.59 -2773.14,-1181.26 U10.1@-2701.77,-1181.26 ; R55.2@-2868.82,-943.15 cw(c-2850.58,-961.39) -2850.58,-935.59 cw(c-2850.58,-909.79) R55.2@-2868.82,-928.03 ; R55.2@-2864.58,-947.39 cw(c-2836.1,-975.87) -2836.1,-935.59 cw(c-2836.1,-895.31) R55.2@-2864.58,-923.79 ; U10.1@-2713.57,-1193.06 ccw(c-2742.05,-1221.54) -2742.05,-1181.26 ccw(c-2742.05,-1140.98) U10.1@-2713.57,-1169.46 ; U10.1@-2709.33,-1188.81 ccw(c-2727.57,-1207.06) -2727.57,-1181.26 ccw(c-2727.57,-1155.46) U10.1@-2709.33,-1173.7
NetR56_2: R56.2 R57.1 U11.1 | length 1119.8
  Top Layer w6: U11.1@-2373.57,-1157.65 ccw(c-2402.05,-1129.17) -2361.77,-1129.17 ccw(c-2321.49,-1129.17) U11.1@-2349.97,-1157.65 ; U11.1@-2369.33,-1161.89 ccw(c-2387.57,-1143.65) -2361.77,-1143.65 ccw(c-2335.97,-1143.65) U11.1@-2354.22,-1161.89 ; U11.1@-2361.77,-1181.26 -2361.77,-1091.55 -2354.81,-1084.59 -2121.81,-1084.59 -2110.81,-1073.59 -2110.81,-947.59 -2098.81,-935.59 R56.2@-2005.27,-935.59 R57.1@-2005.27,-815.59 ; R56.2@-2019.04,-947.39 ccw(c-2047.52,-975.87) -2047.52,-935.59 ccw(c-2047.52,-895.31) R56.2@-2019.04,-923.79 ; R56.2@-2017.07,-923.79 ccw(c-2045.56,-895.31) -2005.27,-895.31 ccw(c-1964.99,-895.31) R56.2@-1993.48,-923.79 ; R57.1@-2017.07,-827.39 cw(c-2045.56,-855.87) -2005.27,-855.87 cw(c-1964.99,-855.87) R57.1@-1993.48,-827.39 ; R56.2@-2014.8,-943.15 ccw(c-2033.04,-961.39) -2033.04,-935.59 ccw(c-2033.04,-909.79) R56.2@-2014.8,-928.03 ; R56.2@-2012.83,-928.03 ccw(c-2031.07,-909.79) -2005.27,-909.79 ccw(c-1979.48,-909.79) R56.2@-1997.72,-928.03 ; R57.1@-2012.83,-823.15 cw(c-2031.07,-841.39) -2005.27,-841.39 cw(c-1979.48,-841.39) R57.1@-1997.72,-823.15
NetR58_1: R58.1 U3.3 | length 1023.5
  Top Layer w6: R58.1@-1058.35,-1975.59 -535.81,-1975.59 -519.53,-1991.87 U3.3@-519.53,-2262.2 ; R58.1@-1048.82,-1983.15 cw(c-1030.58,-2001.39) -1030.58,-1975.59 cw(c-1030.58,-1949.79) R58.1@-1048.82,-1968.03 ; R58.1@-1044.58,-1987.39 cw(c-1016.1,-2015.87) -1016.1,-1975.59 cw(c-1016.1,-1935.31) R58.1@-1044.58,-1963.79 ; U3.3@-531.32,-2226.78 ccw(c-559.81,-2198.3) -519.53,-2198.3 ccw(c-479.25,-2198.3) U3.3@-507.73,-2226.78 ; U3.3@-527.08,-2231.03 ccw(c-545.32,-2212.79) -519.53,-2212.79 ccw(c-493.73,-2212.79) U3.3@-511.97,-2231.03
NetR60_1: R60.1 U6.1 | length 590.5
  Top Layer w6: R60.1@-4586.54,-2000 -4292,-2000 -4275.13,-2016.87 U6.1@-4275.13,-2155.51 ; R60.1@-4577.01,-2007.56 cw(c-4558.77,-2025.8) -4558.77,-2000 cw(c-4558.77,-1974.2) R60.1@-4577.01,-1992.44 ; R60.1@-4572.77,-2011.8 cw(c-4544.29,-2040.28) -4544.29,-2000 cw(c-4544.29,-1959.72) R60.1@-4572.77,-1988.2 ; U6.1@-4280.67,-2149.98 ccw(c-4294.03,-2136.62) -4275.13,-2136.62 ccw(c-4256.24,-2136.62) U6.1@-4269.6,-2149.98
NetR61_2: R61.2 U12.7 | length 1295.2
  Top Layer w6: R61.2@-4958.33,-2568.2 ccw(c-4986.82,-2539.72) -4946.54,-2539.72 ccw(c-4906.25,-2539.72) R61.2@-4934.74,-2568.2 ; R61.2@-4954.09,-2572.44 ccw(c-4972.33,-2554.2) -4946.54,-2554.2 ccw(c-4920.74,-2554.2) R61.2@-4938.98,-2572.44 ; v1@-4951.37,-2526.37 cw(c-4963.05,-2538.05) -4946.54,-2538.05 cw(c-4930.02,-2538.05) v1@-4941.7,-2526.37 ; R61.2@-4946.54,-2580 v1(-4946.54,-2521.54) ; U12.7@-4362.13,-2770 -4283,-2770 -4270,-2757 v1(-4270,-2670) ; U12.7@-4324.4,-2776.23 cw(c-4309.36,-2791.27) -4309.36,-2770 cw(c-4309.36,-2748.73) U12.7@-4324.4,-2763.77 ; v1@-4274.84,-2674.84 cw(c-4286.52,-2686.52) -4270,-2686.52 cw(c-4253.48,-2686.52) v1@-4265.16,-2674.84
  Bottom Layer w6: v1(-4946.54,-2521.54) -4416.46,-2521.54 -4405,-2533 -4405,-2658 -4393,-2670 v1(-4270,-2670) ; v1@-4941.7,-2526.37 cw(c-4930.02,-2538.05) -4930.02,-2521.54 cw(c-4930.02,-2505.02) v1@-4941.7,-2516.7 ; v1@-4274.84,-2674.84 ccw(c-4286.52,-2686.52) -4286.52,-2670 ccw(c-4286.52,-2653.48) v1@-4274.84,-2665.16
NetU4_2: U4.2 Y2.2 | length 606.1
  Top Layer w6: Y2.2@-4907.78,-5055.68 ccw(c-4946.35,-5017.11) -4891.81,-5017.11 ccw(c-4837.27,-5017.11) Y2.2@-4875.84,-5055.68 ; Y2.2@-4903.54,-5059.92 ccw(c-4931.86,-5031.6) -4891.81,-5031.6 ccw(c-4851.76,-5031.6) Y2.2@-4880.08,-5059.92 ; Y2.2@-4891.81,-5075.59 -4891.81,-4801.59 -4880.81,-4790.59 U4.2@-4746.3,-4790.59 ; U4.2@-4784.02,-4796.82 ccw(c-4799.07,-4811.86) -4799.07,-4790.59 ccw(c-4799.07,-4769.32) U4.2@-4784.02,-4784.36
NetU4_3: U4.3 Y2.1 | length 475
  Top Layer w6: Y2.1@-4825.11,-5055.68 ccw(c-4863.67,-5017.11) -4809.13,-5017.11 ccw(c-4754.59,-5017.11) Y2.1@-4793.16,-5055.68 ; Y2.1@-4820.86,-5059.92 ccw(c-4849.19,-5031.6) -4809.13,-5031.6 ccw(c-4769.08,-5031.6) Y2.1@-4797.4,-5059.92 ; Y2.1@-4809.13,-5075.59 -4809.13,-4848.91 -4800.81,-4840.59 U4.3@-4746.3,-4840.59 ; U4.3@-4784.02,-4846.82 ccw(c-4799.07,-4861.86) -4799.07,-4840.59 ccw(c-4799.07,-4819.32) U4.3@-4784.02,-4834.36
NRST: C47.1 KEY1.1 R59.2 U1.28 | length 5231.1
  Top Layer w6: U1.28@-3516.69,-3512.09 -3516.69,-3592.71 -3505.81,-3603.59 -2664.81,-3603.59 -2645.81,-3622.59 -2645.81,-4441.59 -2630.81,-4456.59 -1805.81,-4456.59 -1786.35,-4476.05 C47.1@-1786.35,-4835.59 -1786.35,-5043.9 -1765.81,-5064.44 KEY1.1@-1494.51,-5064.44 KEY1.1@-903.96,-5064.44 ; R59.2@-1798.14,-4987.39 cw(c-1826.63,-5015.87) -1786.35,-5015.87 cw(c-1746.06,-5015.87) R59.2@-1774.55,-4987.39 ; R59.2@-1798.14,-4963.79 ccw(c-1826.63,-4935.31) -1786.35,-4935.31 ccw(c-1746.06,-4935.31) R59.2@-1774.55,-4963.79 ; C47.1@-1798.14,-4847.39 cw(c-1826.63,-4875.87) -1786.35,-4875.87 cw(c-1746.06,-4875.87) C47.1@-1774.55,-4847.39 ; C47.1@-1798.14,-4823.79 ccw(c-1826.63,-4795.31) -1786.35,-4795.31 ccw(c-1746.06,-4795.31) C47.1@-1774.55,-4823.79 ; R59.2@-1793.9,-4983.15 cw(c-1812.14,-5001.39) -1786.35,-5001.39 cw(c-1760.55,-5001.39) R59.2@-1778.79,-4983.15 ; R59.2@-1793.9,-4968.03 ccw(c-1812.14,-4949.79) -1786.35,-4949.79 ccw(c-1760.55,-4949.79) R59.2@-1778.79,-4968.03 ; C47.1@-1793.9,-4843.15 cw(c-1812.14,-4861.39) -1786.35,-4861.39 cw(c-1760.55,-4861.39) C47.1@-1778.79,-4843.15 ; C47.1@-1793.9,-4828.03 ccw(c-1812.14,-4809.79) -1786.35,-4809.79 ccw(c-1760.55,-4809.79) C47.1@-1778.79,-4828.03 ; KEY1.1@-1542.8,-5083.2 ccw(c-1588.08,-5128.48) -1588.08,-5064.44 ccw(c-1588.08,-5000.4) KEY1.1@-1542.8,-5045.68 ; KEY1.1@-1538.55,-5078.96 ccw(c-1573.6,-5114) -1573.6,-5064.44 ccw(c-1573.6,-5014.88) KEY1.1@-1538.55,-5049.93 ; KEY1.1@-1534.31,-5074.71 ccw(c-1559.11,-5099.51) -1559.11,-5064.44 ccw(c-1559.11,-5029.37) KEY1.1@-1534.31,-5054.17 ; KEY1.1@-1454.71,-5074.71 cw(c-1429.91,-5099.51) -1429.91,-5064.44 cw(c-1429.91,-5029.37) KEY1.1@-1454.71,-5054.17 ; KEY1.1@-1450.47,-5078.96 cw(c-1415.43,-5114) -1415.43,-5064.44 cw(c-1415.43,-5014.88) KEY1.1@-1450.47,-5049.93 ; KEY1.1@-1446.23,-5083.2 cw(c-1400.94,-5128.48) -1400.94,-5064.44 cw(c-1400.94,-5000.4) KEY1.1@-1446.23,-5045.68 ; KEY1.1@-952.24,-5083.2 ccw(c-997.53,-5128.48) -997.53,-5064.44 ccw(c-997.53,-5000.4) KEY1.1@-952.24,-5045.68 ; KEY1.1@-948,-5078.96 ccw(c-983.05,-5114) -983.05,-5064.44 ccw(c-983.05,-5014.88) KEY1.1@-948,-5049.93 ; KEY1.1@-943.76,-5074.71 ccw(c-968.56,-5099.51) -968.56,-5064.44 ccw(c-968.56,-5029.37) KEY1.1@-943.76,-5054.17
OSC12M_IN: C1.1 U1.20 Y1.1 | length 1959.9
  Top Layer w6: Y1.1@-3832.54,-4142.31 cw(c-3894.62,-4204.4) -3806.82,-4204.4 cw(c-3719.01,-4204.4) Y1.1@-3781.1,-4142.31 ; Y1.1@-3828.29,-4138.06 cw(c-3880.14,-4189.91) -3806.82,-4189.91 cw(c-3733.5,-4189.91) Y1.1@-3785.34,-4138.06 ; Y1.1@-3824.05,-4133.82 cw(c-3865.65,-4175.42) -3806.82,-4175.42 cw(c-3747.98,-4175.42) Y1.1@-3789.59,-4133.82 ; Y1.1@-3819.81,-4129.58 cw(c-3851.17,-4160.94) -3806.82,-4160.94 cw(c-3762.47,-4160.94) Y1.1@-3793.83,-4129.58 ; C1.1@-3785.07,-4404.79 ccw(c-3813.56,-4376.31) -3773.27,-4376.31 ccw(c-3732.99,-4376.31) C1.1@-3761.48,-4404.79 ; C1.1@-3780.83,-4409.03 ccw(c-3799.07,-4390.79) -3773.27,-4390.79 ccw(c-3747.48,-4390.79) C1.1@-3765.72,-4409.03 ; C1.1@-3773.27,-4416.59 -3773.27,-4271.13 -3806.82,-4237.58 Y1.1@-3806.82,-4116.59 -3656.81,-4116.59 ; Y1.1@-3724.2,-4128.81 cw(c-3696.95,-4153.08) -3696.95,-4116.59 cw(c-3696.95,-4080.1) Y1.1@-3724.2,-4104.37 ; Y1.1@-3719.72,-4132.8 cw(c-3683.57,-4165) -3683.57,-4116.59 cw(c-3683.57,-4068.18) Y1.1@-3719.72,-4100.38 ; Y1.1@-3715.24,-4136.79 cw(c-3670.19,-4176.92) -3670.19,-4116.59 cw(c-3670.19,-4056.26) Y1.1@-3715.24,-4096.39 ; Y1.1@-3710.76,-4140.78 cw(c-3656.81,-4188.84) -3656.81,-4116.59 ; Y1.1@-3710.76,-4092.4 ccw(c-3656.81,-4044.34) -3656.81,-4116.59 ; U1.20@-3642.68,-3512.09 -3642.68,-4102.46 -3656.81,-4116.59
OSC12M_OUT: C2.1 U1.21 Y1.2 | length 2039.6
  Top Layer w6: U1.21@-3626.93,-3512.09 -3626.93,-4104.47 -3614.81,-4116.59 Y1.2@-3432.8,-4116.59 -3432.8,-4260.58 -3466.35,-4294.13 C2.1@-3466.35,-4416.59 ; Y1.2@-3527.42,-4142.31 ccw(c-3589.5,-4204.4) -3589.5,-4116.59 ccw(c-3589.5,-4028.78) Y1.2@-3527.42,-4090.87 ; Y1.2@-3523.17,-4138.06 ccw(c-3575.02,-4189.91) -3575.02,-4116.59 ccw(c-3575.02,-4043.27) Y1.2@-3523.17,-4095.12 ; Y1.2@-3518.93,-4133.82 ccw(c-3560.53,-4175.42) -3560.53,-4116.59 ccw(c-3560.53,-4057.76) Y1.2@-3518.93,-4099.36 ; Y1.2@-3514.69,-4129.58 ccw(c-3546.05,-4160.94) -3546.05,-4116.59 ccw(c-3546.05,-4072.24) Y1.2@-3514.69,-4103.6 ; C2.1@-3478.14,-4404.79 ccw(c-3506.63,-4376.31) -3466.35,-4376.31 ccw(c-3426.06,-4376.31) C2.1@-3454.55,-4404.79 ; C2.1@-3473.9,-4409.03 ccw(c-3492.14,-4390.79) -3466.35,-4390.79 ccw(c-3440.55,-4390.79) C2.1@-3458.79,-4409.03 ; Y1.2@-3458.52,-4142.31 cw(c-3520.61,-4204.4) -3432.8,-4204.4 cw(c-3345,-4204.4) Y1.2@-3407.08,-4142.31 ; Y1.2@-3454.28,-4138.06 cw(c-3506.12,-4189.91) -3432.8,-4189.91 cw(c-3359.48,-4189.91) Y1.2@-3411.33,-4138.06 ; Y1.2@-3450.03,-4133.82 cw(c-3491.64,-4175.42) -3432.8,-4175.42 cw(c-3373.97,-4175.42) Y1.2@-3415.57,-4133.82 ; Y1.2@-3445.79,-4129.58 cw(c-3477.15,-4160.94) -3432.8,-4160.94 cw(c-3388.45,-4160.94) Y1.2@-3419.81,-4129.58
POWER_IN: J3.2 J3.3 SWITCH_POWER.3 | length 2960.9
  Top Layer w10: SWITCH_POWER.3@-5324.25,-860.74 SWITCH_POWER.3@-5101.81,-860.74 -5101.81,-65.59 -5075.81,-39.59 -4568.81,-39.59 -4548.27,-60.13 J3.2@-4548.27,-136.85 J3.3@-4548.27,-373.07 ; SWITCH_POWER.3@-5295.74,-872.52 cw(c-5267.31,-900.95) -5267.31,-860.74 cw(c-5267.31,-820.53) SWITCH_POWER.3@-5295.74,-848.96 ; SWITCH_POWER.3@-5130.32,-872.52 ccw(c-5158.75,-900.95) -5158.75,-860.74 ccw(c-5158.75,-820.53) SWITCH_POWER.3@-5130.32,-848.96 ; SWITCH_POWER.3@-5113.59,-848.96 ccw(c-5142.02,-820.53) -5101.81,-820.53 ccw(c-5061.6,-820.53) SWITCH_POWER.3@-5090.03,-848.96 ; J3.3@-4576.75,-344.59 ccw(c-4645.5,-275.84) -4548.27,-275.84 ccw(c-4451.03,-275.84) J3.3@-4519.79,-344.59 ; J3.2@-4576.75,-165.33 cw(c-4645.5,-234.08) -4548.27,-234.08 cw(c-4451.03,-234.08) J3.2@-4519.79,-165.33 ; J3.2@-4571.14,-103.7 ccw(c-4601.18,-60.14) -4548.27,-60.14 ccw(c-4495.35,-60.14) J3.2@-4525.4,-103.7 ; J3.3@-4569.67,-351.66 ccw(c-4621.36,-299.98) -4548.27,-299.98 ccw(c-4475.17,-299.98) J3.3@-4526.86,-351.66 ; J3.2@-4569.67,-158.26 cw(c-4621.36,-209.94) -4548.27,-209.94 cw(c-4475.17,-209.94) J3.2@-4526.86,-158.26 ; J3.2@-4565.46,-111.93 ccw(c-4588.05,-79.18) -4548.27,-79.18 ccw(c-4508.49,-79.18) J3.2@-4531.07,-111.93 ; J3.3@-4562.6,-358.73 ccw(c-4597.22,-324.12) -4548.27,-324.12 ccw(c-4499.32,-324.12) J3.3@-4533.93,-358.73 ; J3.2@-4562.6,-151.19 cw(c-4597.22,-185.8) -4548.27,-185.8 cw(c-4499.32,-185.8) J3.2@-4533.93,-151.19